# Altium PCB [1] initial circuit.PcbDoc
Units mm, origin at the board's own origin, x right, y up, seen from the top; angles counter-clockwise.
Board outline 47.62 x 91.31 mm, 2 copper layers (Top Layer, Bottom Layer); 26 components, 23 nets, 104 pads, 0 vias.
Unrouted connection lines stored in the file: 58.
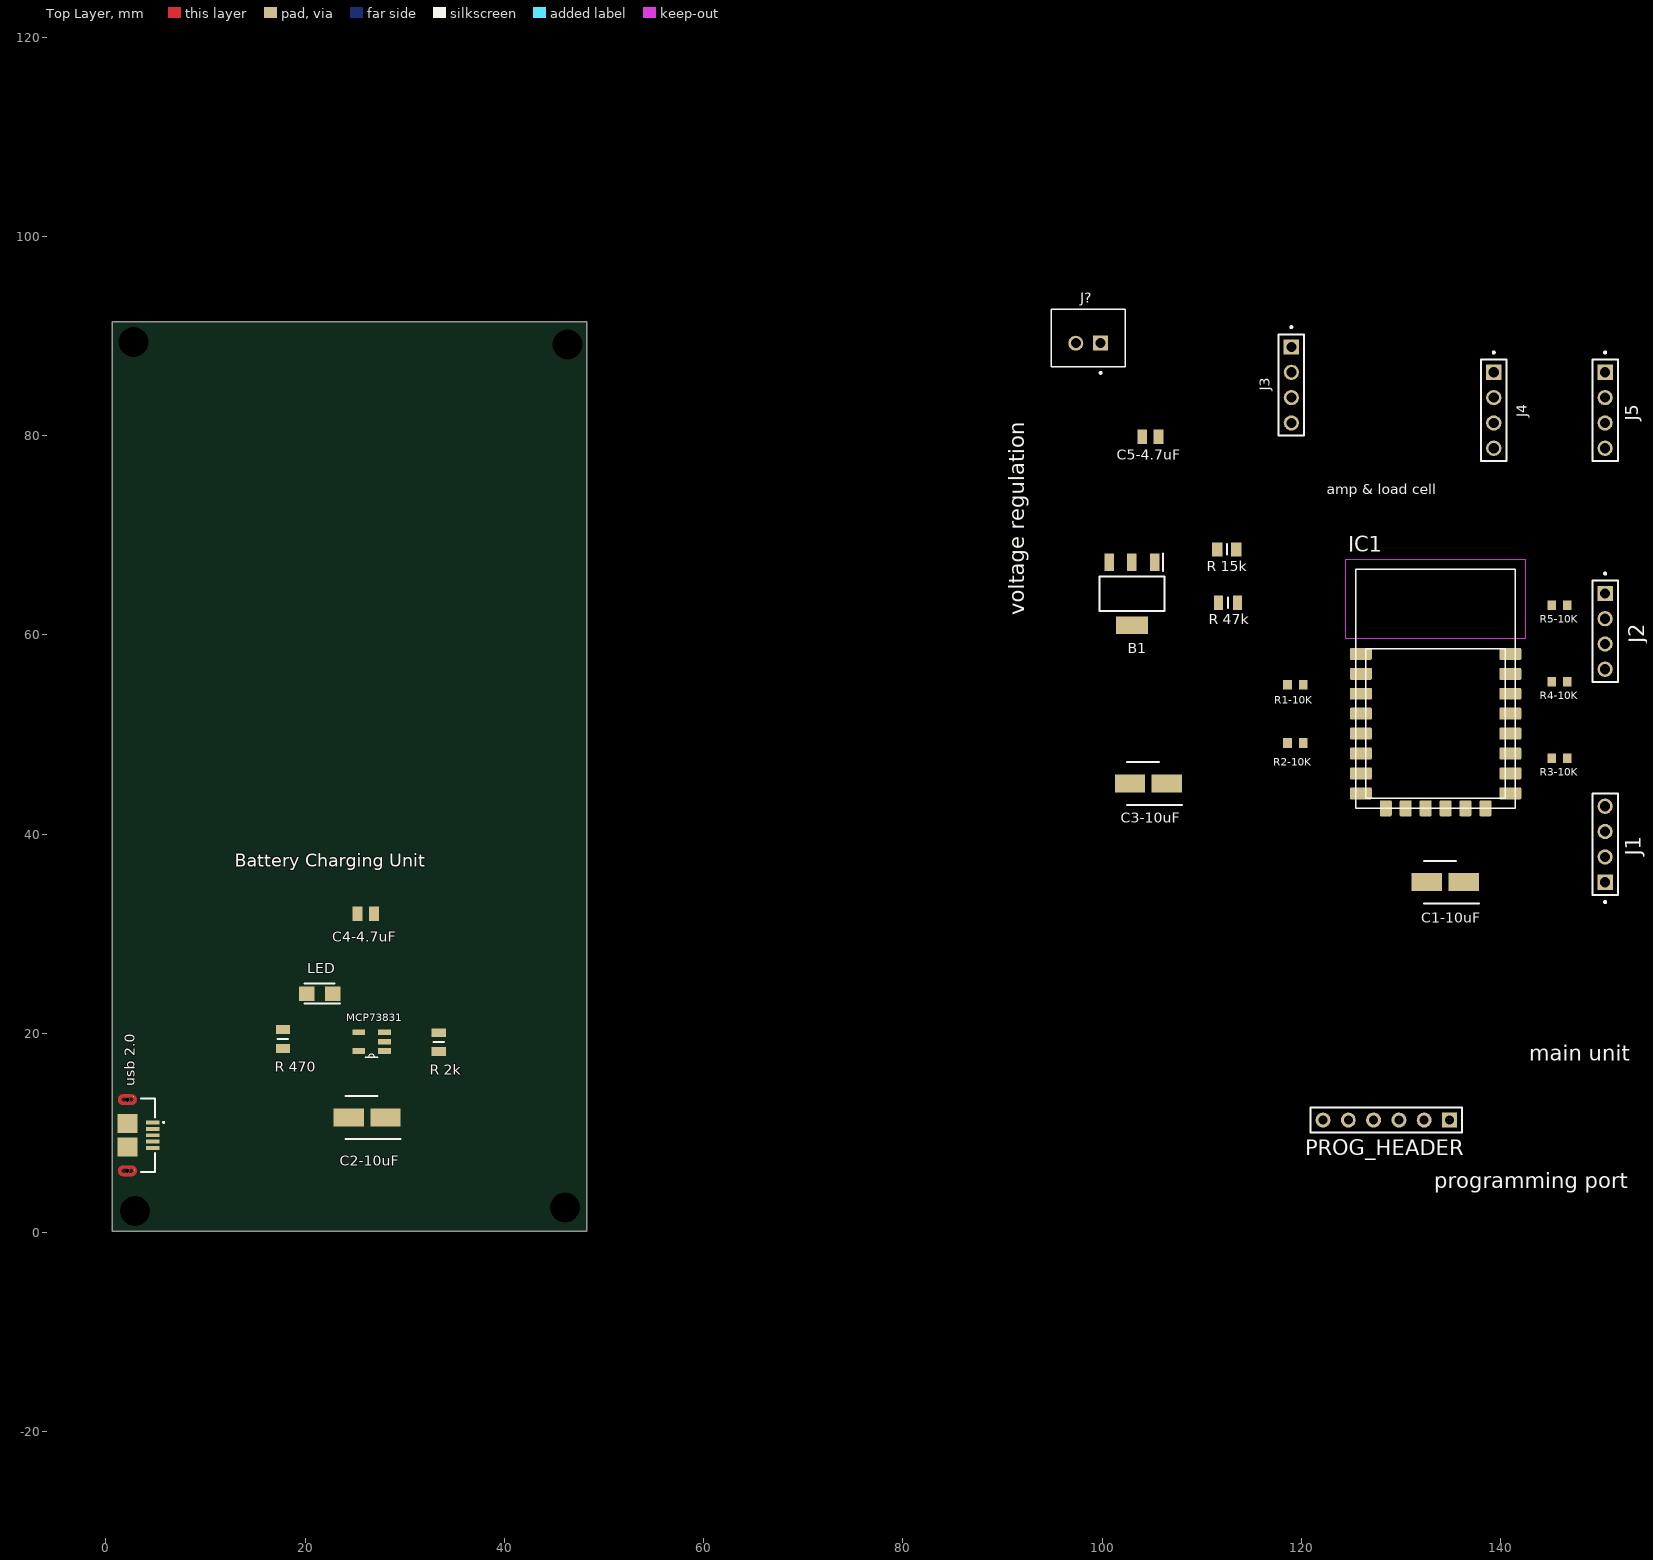
[diagram p0: Top Layer view]
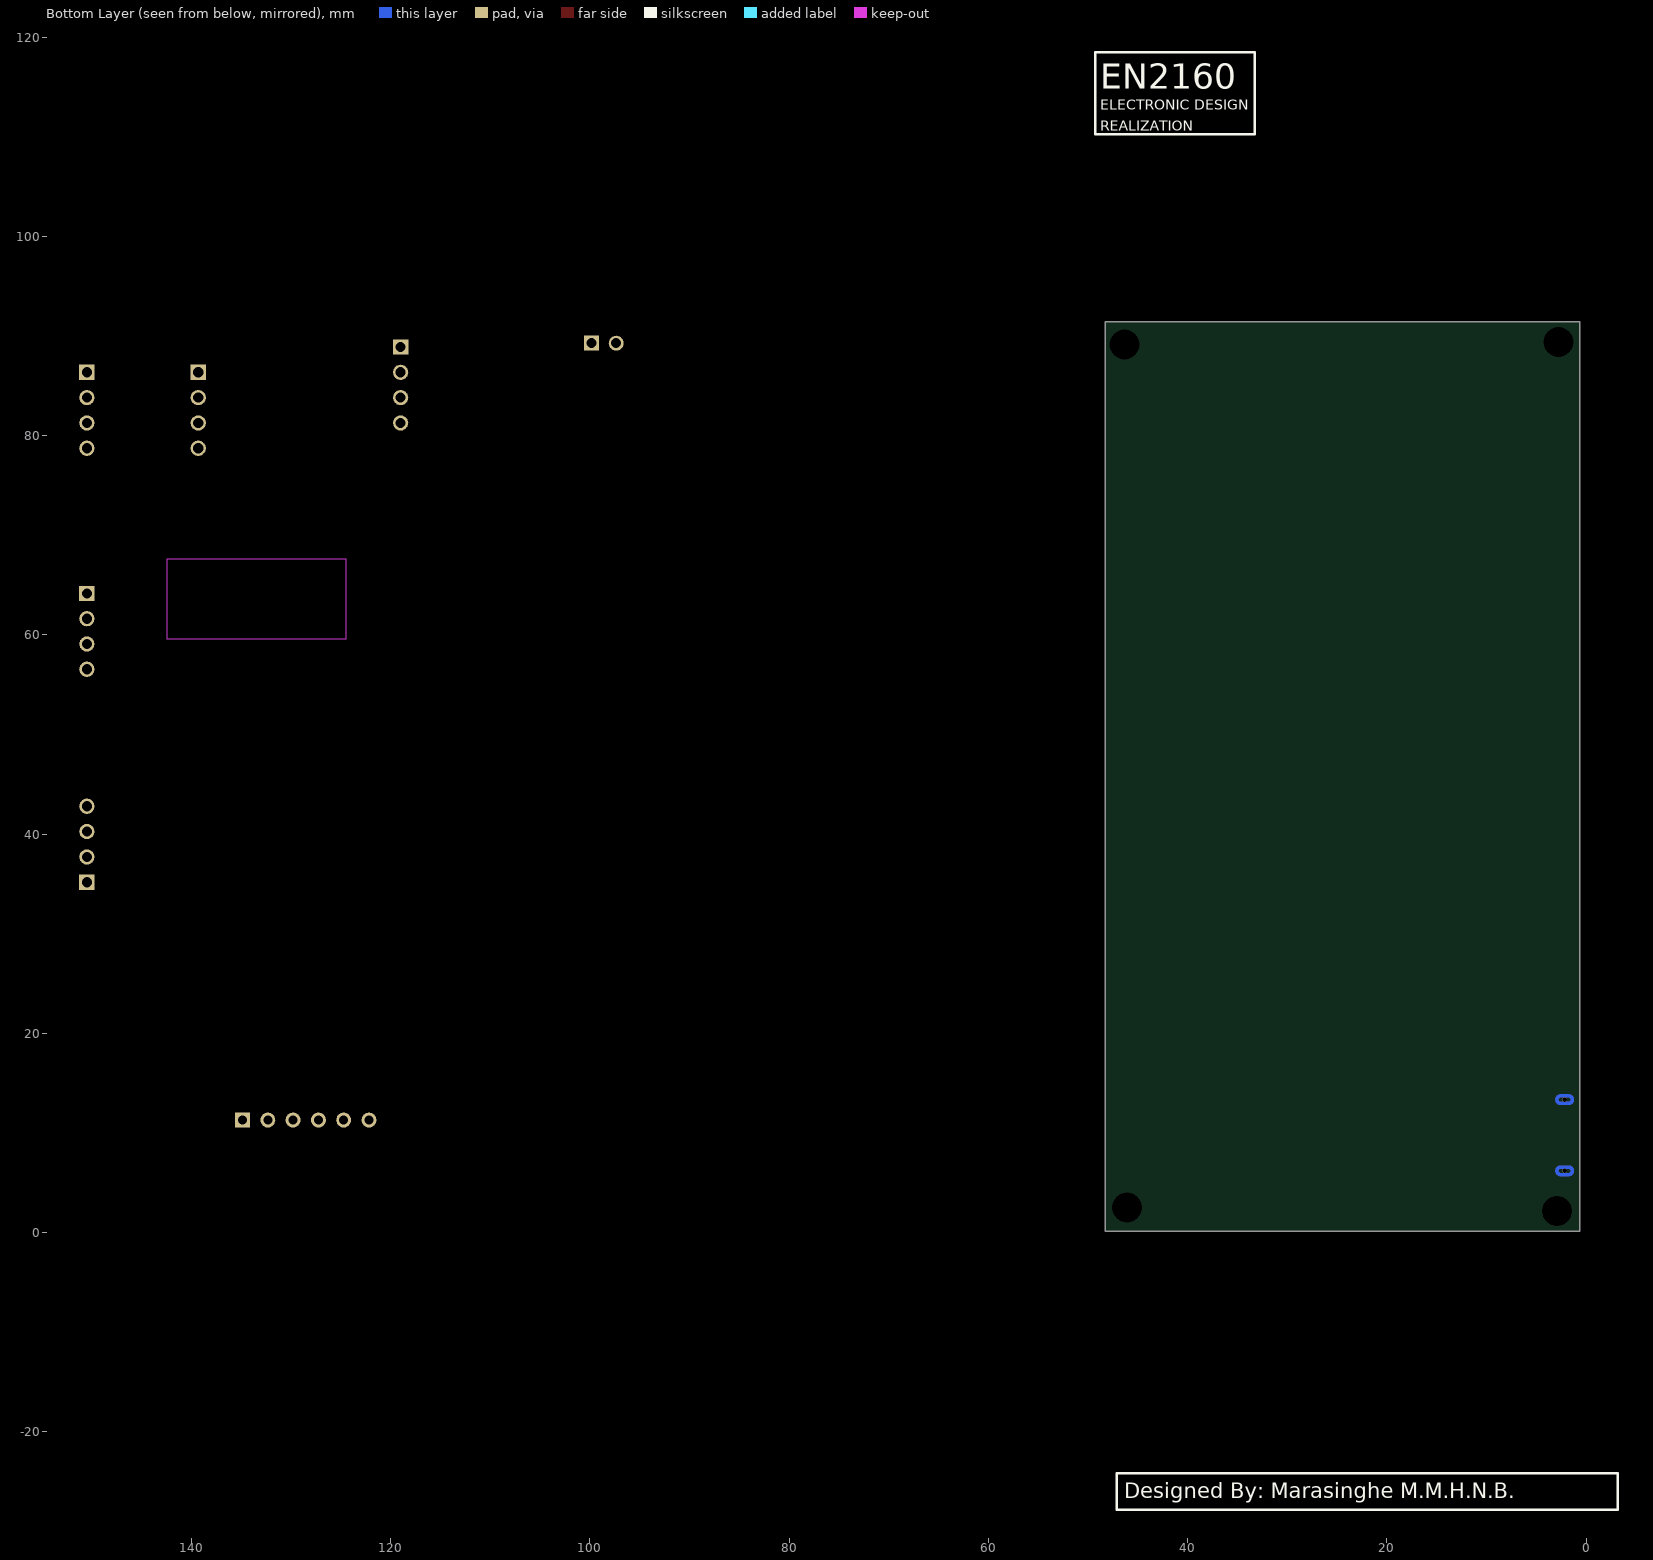
[diagram p1: Bottom Layer view, seen from below]

## Layer stack, top to bottom
Top Solder: solder mask 0.0102, Solder Resist, Dk 3.5
Top Layer: signal copper 0.0356
Dielectric 1: dielectric 0.32, FR-4, Dk 4.8
Bottom Layer: signal copper 0.0356
Bottom Solder: solder mask 0.0102, Solder Resist, Dk 3.5

## Board outline
0.635,0.127 0.635,91.44 48.26,91.44 48.26,0.127

## Design rules (kind name [scope] priority, off if disabled: settings)
Clearance "Clearance Bottom Layer" [OnLayer('Bottom Layer')] p1: gap=0.203 ignorepadtopadclearanceinfootprint=TRUE except(0.254: Arc-Text Track-Text SMDPad-Text THPad-Text Via-Text Fill-Text Poly-Text Region-Text Text-Text)
Clearance "Clearance Top Layer" [OnLayer('Top Layer')] p2: gap=0.203 ignorepadtopadclearanceinfootprint=TRUE except(0.254: Arc-Text Track-Text SMDPad-Text THPad-Text Via-Text Fill-Text Poly-Text Region-Text Text-Text)
Clearance [All] p3: gap=0.2 ignorepadtopadclearanceinfootprint=FALSE except(0.089: Arc-Arc Arc-Track Arc-SMDPad Track-Track Track-SMDPad SMDPad-SMDPad; 0.127: Arc-Via Track-Via SMDPad-Via THPad-Via Via-Via; 0.254: Arc-Text Track-Text SMDPad-Text THPad-Text Via-Text Fill-Text Poly-Text Region-Text Text-Text)
PolygonConnect [All] p1: connectstyle=Relief reliefconductorwidth=0.254 reliefentries=4 polygonreliefangle="90 Angle" airgapwidth=0.254
RoutingVias [All] p1: holewidth=0.711 width=1.27 viastyle="Through Hole" minholewidth=0.711 minwidth=1.27 maxholewidth=0.711 maxwidth=1.27
SolderMaskExpansion [All] p1: expansion=0.102 istentingtop=FALSE
Width [All] p1: maxlimit=0.254 minlimit=0.254 preferedwidth=0.254
30 further rules are at their usual default settings.

## Components (designator, comment, footprint, x,y, rotation, side; value= is the part's Value field where it differs from the comment)
B1 "TC2117-3.3VDBTR" SOT230P700X180-4N 102.997,64.135 r270 top
C1-10uF "865080340001" CAPAE430X550N 134.438,35.179 r180 top
C2-10uF "865080340001" CAPAE430X550N 26.217,11.557 r180 top
C3-10uF "865080340001" CAPAE430X550N 104.648,45.085 r180 top
C4-4.7uF "885012107013" CAPC2012X145N 26.093,32.004 r180 top
C5-4.7uF "885012107013" CAPC2012X145N 104.847,79.883 r180 top
IC1 "ESP-12F" ESP-12F 133.477,53.594 r0 top
J1 "MTSW-104-XX-X-S-XXX" SAMTEC_MTSW-104-XX-X-S-XXX 150.495,38.989 r90 top
J2 "MTSW-104-XX-X-S-XXX" SAMTEC_MTSW-104-XX-X-S-XXX 150.495,60.359 r270 top
J3 "MTSW-104-XX-X-S-XXX" SAMTEC_MTSW-104-XX-X-S-XXX 118.999,85.09 r270 top
J4 "MTSW-104-XX-X-S-XXX" SAMTEC_MTSW-104-XX-X-S-XXX 139.319,82.55 r270 top
J5 "MTSW-104-XX-X-S-XXX" SAMTEC_MTSW-104-XX-X-S-XXX 150.495,82.55 r270 top
J? "B2B-XH-A(LF)(SN)" JST_B2B-XH-A(LF)(SN) 98.61,89.281 r0 top
LED "CLM3C-AKW-CUAVB253" LEDM3020X140N 21.463,24.003 r180 top
MCP73831 "MCP73831T-5ACI/OT" SOT95P280X145-5N 26.67,19.177 r180 top
PROG_HEADER "Header 6" HDR1X6 134.874,11.303 r180 top
R1-10K "CRG0603F10K/10" RESC1608X55N 119.398,54.991 r180 top
R2-10K "CRG0603F10K/10" RESC1608X55N 119.398,49.149 r180 top
R3-10K "CRG0603F10K/10" RESC1608X55N 145.923,47.625 r180 top
R4-10K "CRG0603F10K/10" RESC1608X55N 145.923,55.308 r180 top
R5-10K "CRG0603F10K/10" RESC1608X55N 145.923,62.992 r180 top
"R 2k" "CR0805-JW-202ELF" RESC2012X60N 33.401,19.116 r270 top
"R 15k" "ERJ-6GEYJ153V" RESC2012X70N 112.522,68.58 r0 top
"R 47k" "CR0805-JW-473ELF" RESC2012X60N 112.649,63.246 r180 top
"R 470" "CRCW0805470RFKEAC" RESC2012X60N 17.78,19.431 r90 top
"usb 2.0" "USB3090-XX-X_REVE" GCT_USB3090-XX-X_REVE 2.159,9.779 r270 top

## Footprints (in the part's own frame and the unit in brackets; to place one, negate y for a bottom-side part, rotate by r counter-clockwise, add the part's x,y. Pads: shape width x height; smd on the part's side, far side on the other; paste and mask are expansions set on the pad)
CAPAE430X550N [mm]
  rect 3.05x1.8 smd: 1(-1.85,0) 2(1.85,0)
  silkscreen extent -3.37,-2.15 2.15,2.15, body extent -10,-3.38 10,3.38, height 5.8
CAPC2012X145N [mm]
  rect 0.99x1.47 smd: 1(-0.82,0) 2(0.82,0)
  body extent -10,-3.38 10,3.38, height 5.8
ESP-12F [mm]
  rrect20% 2.2x1.2 smd: 1(-7.5,4.5) 2(-7.5,2.5) 3(-7.5,0.5) 4(-7.5,-1.5) 5(-7.5,-3.5) 6(-7.5,-5.5) 7(-7.5,-7.5) 8(-7.5,-9.5) 9(7.5,-9.5) 10(7.5,-7.5) 11(7.5,-5.5) 12(7.5,-3.5) 13(7.5,-1.5) 14(7.5,0.5) 15(7.5,2.5) 16(7.5,4.5)
  rrect20% 1.2x1.6 smd: 17(-5,-11) 18(-3,-11) 19(-1,-11) 20(1,-11) 21(3,-11) 22(5,-11)
  Keep-Out Layer region: 9,6.011 -9.016,6.011 -9.016,14 9,14
  Keep-Out Layer region: 9,6.005 -9.007,6.005 -9.007,14 9,14
  silkscreen extent -8,-11 8,13, body extent -8.85,-11.88 8.85,13.02, height 3.1
GCT_USB3090-XX-X_REVE [mm]
  rect 0.4x1.4 smd: 1(-1.3,2.55) 2(-0.65,2.55) 3(0,2.55) 4(0.65,2.55) 5(1.3,2.55)
  rect 0.1x0.1 smd paste-1 mask+0: 6(-3.87,0.63) 7(3.51,0.72)
  rect 1.9x2 smd: 8(-1.2,0) 9(1.2,0)
  round 0.45 hole 0.45 unplated: ""(-3.575,0) ""(3.575,0)
  Top Layer region: -3.548,0.924 -3.52,0.922 -3.493,0.919 -3.466,0.914 -3.439,0.907 -3.413,0.899 -3.387,0.89 -3.361,0.88 -3.337,0.868 -3.313,0.855 -3.289,0.84 -3.266,0.825 -3.245,0.808 -3.224,0.79 -3.204,0.771 -3.185,0.751 -3.167,0.73 -3.15,0.709 -3.135,0.686 -3.12,0.662 -3.107,0.638 -3.095,0.614 -3.085,0.588 -3.076,0.562 -3.068,0.536 -3.061,0.509 -3.056,0.482 -3.053,0.455 -3.051,0.427 -3.05,0.4 -3.05,0 -3.35,0 -3.35,0.4 -3.35,0.412 -3.351,0.424 -3.353,0.435 -3.355,0.447 -3.358,0.458 -3.361,0.47 -3.365,0.481 -3.369,0.492 -3.375,0.502 -3.38,0.512 -3.386,0.523 -3.393,0.532 -3.4,0.542 -3.408,0.551 -3.416,0.559 -3.424,0.567 -3.433,0.575 -3.443,0.582 -3.452,0.589 -3.463,0.595 -3.473,0.6 -3.483,0.606 -3.494,0.61 -3.505,0.614 -3.517,0.617 -3.528,0.62 -3.54,0.622 -3.551,0.624 -3.563,0.625 -3.587,0.625 -3.599,0.624 -3.61,0.622 -3.622,0.62 -3.633,0.617 -3.645,0.614 -3.656,0.61 -3.667,0.606 -3.677,0.6 -3.688,0.595 -3.698,0.589 -3.707,0.582 -3.717,0.575 -3.726,0.567 -3.734,0.559 -3.742,0.551 -3.75,0.542 -3.757,0.532 -3.764,0.523 -3.77,0.513 -3.775,0.502 -3.781,0.492 -3.785,0.481 -3.789,0.47 -3.792,0.458 -3.795,0.447 -3.797,0.435 -3.799,0.424 -3.8,0.412 -3.8,0.4 -3.8,0 -4.1,0 -4.1,0.4 -4.099,0.427 -4.097,0.455 -4.094,0.482 -4.089,0.509 -4.082,0.536 -4.074,0.562 -4.065,0.588 -4.055,0.614 -4.043,0.638 -4.03,0.663 -4.015,0.686 -4,0.709 -3.983,0.73 -3.965,0.751 -3.946,0.771 -3.926,0.79 -3.905,0.808 -3.884,0.825 -3.861,0.84 -3.837,0.855 -3.813,0.868 -3.789,0.88 -3.763,0.89 -3.737,0.899 -3.711,0.907 -3.684,0.914 -3.657,0.919 -3.63,0.922 -3.602,0.924 -3.575,0.925
  Top Layer region: -3.05,-0.4 -3.051,-0.427 -3.053,-0.455 -3.056,-0.482 -3.061,-0.509 -3.068,-0.536 -3.076,-0.562 -3.085,-0.588 -3.095,-0.614 -3.107,-0.638 -3.12,-0.662 -3.135,-0.686 -3.15,-0.709 -3.167,-0.73 -3.185,-0.751 -3.204,-0.771 -3.224,-0.79 -3.245,-0.808 -3.266,-0.825 -3.289,-0.84 -3.313,-0.855 -3.337,-0.868 -3.361,-0.88 -3.387,-0.89 -3.413,-0.899 -3.439,-0.907 -3.466,-0.914 -3.493,-0.919 -3.52,-0.922 -3.548,-0.924 -3.575,-0.925 -3.602,-0.924 -3.63,-0.922 -3.657,-0.919 -3.684,-0.914 -3.711,-0.907 -3.737,-0.899 -3.763,-0.89 -3.789,-0.88 -3.813,-0.868 -3.837,-0.855 -3.861,-0.84 -3.884,-0.825 -3.905,-0.808 -3.926,-0.79 -3.946,-0.771 -3.965,-0.751 -3.983,-0.73 -4,-0.709 -4.015,-0.686 -4.03,-0.663 -4.043,-0.638 -4.055,-0.614 -4.065,-0.588 -4.074,-0.562 -4.082,-0.536 -4.089,-0.509 -4.094,-0.482 -4.097,-0.455 -4.099,-0.427 -4.1,-0.4 -4.1,0 -3.8,0 -3.8,-0.4 -3.8,-0.412 -3.799,-0.424 -3.797,-0.435 -3.795,-0.447 -3.792,-0.458 -3.789,-0.47 -3.785,-0.481 -3.781,-0.492 -3.775,-0.502 -3.77,-0.513 -3.764,-0.523 -3.757,-0.532 -3.75,-0.542 -3.742,-0.551 -3.734,-0.559 -3.726,-0.567 -3.717,-0.575 -3.707,-0.582 -3.698,-0.589 -3.688,-0.595 -3.677,-0.6 -3.667,-0.606 -3.656,-0.61 -3.645,-0.614 -3.633,-0.617 -3.622,-0.62 -3.61,-0.622 -3.599,-0.624 -3.587,-0.625 -3.563,-0.625 -3.551,-0.624 -3.54,-0.622 -3.528,-0.62 -3.517,-0.617 -3.505,-0.614 -3.494,-0.61 -3.483,-0.606 -3.473,-0.6 -3.463,-0.595 -3.452,-0.589 -3.443,-0.582 -3.433,-0.575 -3.424,-0.567 -3.416,-0.559 -3.408,-0.551 -3.4,-0.542 -3.393,-0.532 -3.386,-0.523 -3.38,-0.512 -3.375,-0.502 -3.369,-0.492 -3.365,-0.481 -3.361,-0.47 -3.358,-0.458 -3.355,-0.447 -3.353,-0.435 -3.351,-0.424 -3.35,-0.412 -3.35,-0.4 -3.35,0 -3.05,0
  Top Layer region: 3.602,0.924 3.63,0.922 3.657,0.919 3.684,0.914 3.711,0.907 3.737,0.899 3.763,0.89 3.789,0.88 3.813,0.868 3.837,0.855 3.861,0.84 3.884,0.825 3.905,0.808 3.926,0.79 3.946,0.771 3.965,0.751 3.983,0.73 4,0.709 4.015,0.686 4.03,0.663 4.043,0.638 4.055,0.614 4.065,0.588 4.074,0.562 4.082,0.536 4.089,0.509 4.094,0.482 4.097,0.455 4.099,0.427 4.1,0.4 4.1,0 3.8,0 3.8,0.4 3.8,0.412 3.799,0.424 3.797,0.435 3.795,0.447 3.792,0.458 3.789,0.47 3.785,0.481 3.781,0.492 3.775,0.502 3.77,0.513 3.764,0.523 3.757,0.532 3.75,0.542 3.742,0.551 3.734,0.559 3.726,0.567 3.717,0.575 3.707,0.582 3.698,0.589 3.688,0.595 3.677,0.6 3.667,0.606 3.656,0.61 3.645,0.614 3.633,0.617 3.622,0.62 3.61,0.622 3.599,0.624 3.587,0.625 3.563,0.625 3.551,0.624 3.54,0.622 3.528,0.62 3.517,0.617 3.505,0.614 3.494,0.61 3.483,0.606 3.473,0.6 3.463,0.595 3.452,0.589 3.443,0.582 3.433,0.575 3.424,0.567 3.416,0.559 3.408,0.551 3.4,0.542 3.393,0.532 3.386,0.523 3.38,0.512 3.375,0.502 3.369,0.492 3.365,0.481 3.361,0.47 3.358,0.458 3.355,0.447 3.353,0.435 3.351,0.424 3.35,0.412 3.35,0.4 3.35,0 3.05,0 3.05,0.4 3.051,0.427 3.053,0.455 3.056,0.482 3.061,0.509 3.068,0.536 3.076,0.562 3.085,0.588 3.095,0.614 3.107,0.638 3.12,0.662 3.135,0.686 3.15,0.709 3.167,0.73 3.185,0.751 3.204,0.771 3.224,0.79 3.245,0.808 3.266,0.825 3.289,0.84 3.313,0.855 3.337,0.868 3.361,0.88 3.387,0.89 3.413,0.899 3.439,0.907 3.466,0.914 3.493,0.919 3.52,0.922 3.548,0.924 3.575,0.925
  Top Layer region: 4.1,-0.4 4.099,-0.427 4.097,-0.455 4.094,-0.482 4.089,-0.509 4.082,-0.536 4.074,-0.562 4.065,-0.588 4.055,-0.614 4.043,-0.638 4.03,-0.663 4.015,-0.686 4,-0.709 3.983,-0.73 3.965,-0.751 3.946,-0.771 3.926,-0.79 3.905,-0.808 3.884,-0.825 3.861,-0.84 3.837,-0.855 3.813,-0.868 3.789,-0.88 3.763,-0.89 3.737,-0.899 3.711,-0.907 3.684,-0.914 3.657,-0.919 3.63,-0.922 3.602,-0.924 3.575,-0.925 3.548,-0.924 3.52,-0.922 3.493,-0.919 3.466,-0.914 3.439,-0.907 3.413,-0.899 3.387,-0.89 3.361,-0.88 3.337,-0.868 3.313,-0.855 3.289,-0.84 3.266,-0.825 3.245,-0.808 3.224,-0.79 3.204,-0.771 3.185,-0.751 3.167,-0.73 3.15,-0.709 3.135,-0.686 3.12,-0.662 3.107,-0.638 3.095,-0.614 3.085,-0.588 3.076,-0.562 3.068,-0.536 3.061,-0.509 3.056,-0.482 3.053,-0.455 3.051,-0.427 3.05,-0.4 3.05,0 3.35,0 3.35,-0.4 3.35,-0.412 3.351,-0.424 3.353,-0.435 3.355,-0.447 3.358,-0.458 3.361,-0.47 3.365,-0.481 3.369,-0.492 3.375,-0.502 3.38,-0.512 3.386,-0.523 3.393,-0.532 3.4,-0.542 3.408,-0.551 3.416,-0.559 3.424,-0.567 3.433,-0.575 3.443,-0.582 3.452,-0.589 3.463,-0.595 3.473,-0.6 3.483,-0.606 3.494,-0.61 3.505,-0.614 3.517,-0.617 3.528,-0.62 3.54,-0.622 3.551,-0.624 3.563,-0.625 3.587,-0.625 3.599,-0.624 3.61,-0.622 3.622,-0.62 3.633,-0.617 3.645,-0.614 3.656,-0.61 3.667,-0.606 3.677,-0.6 3.688,-0.595 3.698,-0.589 3.707,-0.582 3.717,-0.575 3.726,-0.567 3.734,-0.559 3.742,-0.551 3.75,-0.542 3.757,-0.532 3.764,-0.523 3.77,-0.513 3.775,-0.502 3.781,-0.492 3.785,-0.481 3.789,-0.47 3.792,-0.458 3.795,-0.447 3.797,-0.435 3.799,-0.424 3.8,-0.412 3.8,-0.4 3.8,0 4.1,0
  Bottom Layer region: -3.548,0.924 -3.52,0.922 -3.493,0.919 -3.466,0.914 -3.439,0.907 -3.413,0.899 -3.387,0.89 -3.361,0.88 -3.337,0.868 -3.313,0.855 -3.289,0.84 -3.266,0.825 -3.245,0.808 -3.224,0.79 -3.204,0.771 -3.185,0.751 -3.167,0.73 -3.15,0.709 -3.135,0.686 -3.12,0.662 -3.107,0.638 -3.095,0.614 -3.085,0.588 -3.076,0.562 -3.068,0.536 -3.061,0.509 -3.056,0.482 -3.053,0.455 -3.051,0.427 -3.05,0.4 -3.05,0 -3.35,0 -3.35,0.4 -3.35,0.412 -3.351,0.424 -3.353,0.435 -3.355,0.447 -3.358,0.458 -3.361,0.47 -3.365,0.481 -3.369,0.492 -3.375,0.502 -3.38,0.512 -3.386,0.523 -3.393,0.532 -3.4,0.542 -3.408,0.551 -3.416,0.559 -3.424,0.567 -3.433,0.575 -3.443,0.582 -3.452,0.589 -3.463,0.595 -3.473,0.6 -3.483,0.606 -3.494,0.61 -3.505,0.614 -3.517,0.617 -3.528,0.62 -3.54,0.622 -3.551,0.624 -3.563,0.625 -3.587,0.625 -3.599,0.624 -3.61,0.622 -3.622,0.62 -3.633,0.617 -3.645,0.614 -3.656,0.61 -3.667,0.606 -3.677,0.6 -3.688,0.595 -3.698,0.589 -3.707,0.582 -3.717,0.575 -3.726,0.567 -3.734,0.559 -3.742,0.551 -3.75,0.542 -3.757,0.532 -3.764,0.523 -3.77,0.513 -3.775,0.502 -3.781,0.492 -3.785,0.481 -3.789,0.47 -3.792,0.458 -3.795,0.447 -3.797,0.435 -3.799,0.424 -3.8,0.412 -3.8,0.4 -3.8,0 -4.1,0 -4.1,0.4 -4.099,0.427 -4.097,0.455 -4.094,0.482 -4.089,0.509 -4.082,0.536 -4.074,0.562 -4.065,0.588 -4.055,0.614 -4.043,0.638 -4.03,0.663 -4.015,0.686 -4,0.709 -3.983,0.73 -3.965,0.751 -3.946,0.771 -3.926,0.79 -3.905,0.808 -3.884,0.825 -3.861,0.84 -3.837,0.855 -3.813,0.868 -3.789,0.88 -3.763,0.89 -3.737,0.899 -3.711,0.907 -3.684,0.914 -3.657,0.919 -3.63,0.922 -3.602,0.924 -3.575,0.925
  Bottom Layer region: -3.05,-0.4 -3.051,-0.427 -3.053,-0.455 -3.056,-0.482 -3.061,-0.509 -3.068,-0.536 -3.076,-0.562 -3.085,-0.588 -3.095,-0.614 -3.107,-0.638 -3.12,-0.662 -3.135,-0.686 -3.15,-0.709 -3.167,-0.73 -3.185,-0.751 -3.204,-0.771 -3.224,-0.79 -3.245,-0.808 -3.266,-0.825 -3.289,-0.84 -3.313,-0.855 -3.337,-0.868 -3.361,-0.88 -3.387,-0.89 -3.413,-0.899 -3.439,-0.907 -3.466,-0.914 -3.493,-0.919 -3.52,-0.922 -3.548,-0.924 -3.575,-0.925 -3.602,-0.924 -3.63,-0.922 -3.657,-0.919 -3.684,-0.914 -3.711,-0.907 -3.737,-0.899 -3.763,-0.89 -3.789,-0.88 -3.813,-0.868 -3.837,-0.855 -3.861,-0.84 -3.884,-0.825 -3.905,-0.808 -3.926,-0.79 -3.946,-0.771 -3.965,-0.751 -3.983,-0.73 -4,-0.709 -4.015,-0.686 -4.03,-0.663 -4.043,-0.638 -4.055,-0.614 -4.065,-0.588 -4.074,-0.562 -4.082,-0.536 -4.089,-0.509 -4.094,-0.482 -4.097,-0.455 -4.099,-0.427 -4.1,-0.4 -4.1,0 -3.8,0 -3.8,-0.4 -3.8,-0.412 -3.799,-0.424 -3.797,-0.435 -3.795,-0.447 -3.792,-0.458 -3.789,-0.47 -3.785,-0.481 -3.781,-0.492 -3.775,-0.502 -3.77,-0.513 -3.764,-0.523 -3.757,-0.532 -3.75,-0.542 -3.742,-0.551 -3.734,-0.559 -3.726,-0.567 -3.717,-0.575 -3.707,-0.582 -3.698,-0.589 -3.688,-0.595 -3.677,-0.6 -3.667,-0.606 -3.656,-0.61 -3.645,-0.614 -3.633,-0.617 -3.622,-0.62 -3.61,-0.622 -3.599,-0.624 -3.587,-0.625 -3.563,-0.625 -3.551,-0.624 -3.54,-0.622 -3.528,-0.62 -3.517,-0.617 -3.505,-0.614 -3.494,-0.61 -3.483,-0.606 -3.473,-0.6 -3.463,-0.595 -3.452,-0.589 -3.443,-0.582 -3.433,-0.575 -3.424,-0.567 -3.416,-0.559 -3.408,-0.551 -3.4,-0.542 -3.393,-0.532 -3.386,-0.523 -3.38,-0.512 -3.375,-0.502 -3.369,-0.492 -3.365,-0.481 -3.361,-0.47 -3.358,-0.458 -3.355,-0.447 -3.353,-0.435 -3.351,-0.424 -3.35,-0.412 -3.35,-0.4 -3.35,0 -3.05,0
  Bottom Layer region: 3.602,0.924 3.63,0.922 3.657,0.919 3.684,0.914 3.711,0.907 3.737,0.899 3.763,0.89 3.789,0.88 3.813,0.868 3.837,0.855 3.861,0.84 3.884,0.825 3.905,0.808 3.926,0.79 3.946,0.771 3.965,0.751 3.983,0.73 4,0.709 4.015,0.686 4.03,0.663 4.043,0.638 4.055,0.614 4.065,0.588 4.074,0.562 4.082,0.536 4.089,0.509 4.094,0.482 4.097,0.455 4.099,0.427 4.1,0.4 4.1,0 3.8,0 3.8,0.4 3.8,0.412 3.799,0.424 3.797,0.435 3.795,0.447 3.792,0.458 3.789,0.47 3.785,0.481 3.781,0.492 3.775,0.502 3.77,0.513 3.764,0.523 3.757,0.532 3.75,0.542 3.742,0.551 3.734,0.559 3.726,0.567 3.717,0.575 3.707,0.582 3.698,0.589 3.688,0.595 3.677,0.6 3.667,0.606 3.656,0.61 3.645,0.614 3.633,0.617 3.622,0.62 3.61,0.622 3.599,0.624 3.587,0.625 3.563,0.625 3.551,0.624 3.54,0.622 3.528,0.62 3.517,0.617 3.505,0.614 3.494,0.61 3.483,0.606 3.473,0.6 3.463,0.595 3.452,0.589 3.443,0.582 3.433,0.575 3.424,0.567 3.416,0.559 3.408,0.551 3.4,0.542 3.393,0.532 3.386,0.523 3.38,0.512 3.375,0.502 3.369,0.492 3.365,0.481 3.361,0.47 3.358,0.458 3.355,0.447 3.353,0.435 3.351,0.424 3.35,0.412 3.35,0.4 3.35,0 3.05,0 3.05,0.4 3.051,0.427 3.053,0.455 3.056,0.482 3.061,0.509 3.068,0.536 3.076,0.562 3.085,0.588 3.095,0.614 3.107,0.638 3.12,0.662 3.135,0.686 3.15,0.709 3.167,0.73 3.185,0.751 3.204,0.771 3.224,0.79 3.245,0.808 3.266,0.825 3.289,0.84 3.313,0.855 3.337,0.868 3.361,0.88 3.387,0.89 3.413,0.899 3.439,0.907 3.466,0.914 3.493,0.919 3.52,0.922 3.548,0.924 3.575,0.925
  Bottom Layer region: 4.1,-0.4 4.099,-0.427 4.097,-0.455 4.094,-0.482 4.089,-0.509 4.082,-0.536 4.074,-0.562 4.065,-0.588 4.055,-0.614 4.043,-0.638 4.03,-0.663 4.015,-0.686 4,-0.709 3.983,-0.73 3.965,-0.751 3.946,-0.771 3.926,-0.79 3.905,-0.808 3.884,-0.825 3.861,-0.84 3.837,-0.855 3.813,-0.868 3.789,-0.88 3.763,-0.89 3.737,-0.899 3.711,-0.907 3.684,-0.914 3.657,-0.919 3.63,-0.922 3.602,-0.924 3.575,-0.925 3.548,-0.924 3.52,-0.922 3.493,-0.919 3.466,-0.914 3.439,-0.907 3.413,-0.899 3.387,-0.89 3.361,-0.88 3.337,-0.868 3.313,-0.855 3.289,-0.84 3.266,-0.825 3.245,-0.808 3.224,-0.79 3.204,-0.771 3.185,-0.751 3.167,-0.73 3.15,-0.709 3.135,-0.686 3.12,-0.662 3.107,-0.638 3.095,-0.614 3.085,-0.588 3.076,-0.562 3.068,-0.536 3.061,-0.509 3.056,-0.482 3.053,-0.455 3.051,-0.427 3.05,-0.4 3.05,0 3.35,0 3.35,-0.4 3.35,-0.412 3.351,-0.424 3.353,-0.435 3.355,-0.447 3.358,-0.458 3.361,-0.47 3.365,-0.481 3.369,-0.492 3.375,-0.502 3.38,-0.512 3.386,-0.523 3.393,-0.532 3.4,-0.542 3.408,-0.551 3.416,-0.559 3.424,-0.567 3.433,-0.575 3.443,-0.582 3.452,-0.589 3.463,-0.595 3.473,-0.6 3.483,-0.606 3.494,-0.61 3.505,-0.614 3.517,-0.617 3.528,-0.62 3.54,-0.622 3.551,-0.624 3.563,-0.625 3.587,-0.625 3.599,-0.624 3.61,-0.622 3.622,-0.62 3.633,-0.617 3.645,-0.614 3.656,-0.61 3.667,-0.606 3.677,-0.6 3.688,-0.595 3.698,-0.589 3.707,-0.582 3.717,-0.575 3.726,-0.567 3.734,-0.559 3.742,-0.551 3.75,-0.542 3.757,-0.532 3.764,-0.523 3.77,-0.513 3.775,-0.502 3.781,-0.492 3.785,-0.481 3.789,-0.47 3.792,-0.458 3.795,-0.447 3.797,-0.435 3.799,-0.424 3.8,-0.412 3.8,-0.4 3.8,0 4.1,0
  silkscreen extent -3.7,1.37 3.7,3.69, body extent -3.9,-2.75 3.9,2.75, height 2.71
HDR1X6 [mm] "Connector; Header; 6 Position"
  rect 1.5x1.5 hole 0.9: 1(0,0)
  round 1.5 hole 0.9: 2(2.54,0) 3(5.08,0) 4(7.62,0) 5(10.16,0) 6(12.7,0)
  silkscreen extent -1.27,-1.27 13.97,1.27
JST_B2B-XH-A(LF)(SN) [mm]
  rect 1.508x1.508 hole 1: 1(1.25,0)
  round 1.508 hole 1: 2(-1.25,0)
  silkscreen extent -3.7,-3.07 3.7,3.4, body extent -3.72,-2.37 3.68,3.38, height 7
LEDM3020X140N [mm]
  rect 1.55x1.45 smd: 1(-1.3,0) 2(1.3,0)
  silkscreen extent -2.02,-1 1.5,1, body extent -1.5,-0.49 1.5,0.51, height 2.01
RESC1608X55N [mm]
  rect 0.87x0.97 smd: 1(-0.78,0) 2(0.78,0)
  body extent -0.8,-0.4 0.8,0.4, height 0.55
RESC2012X60N [mm]
  rect 0.9x1.45 smd: 1(-0.95,0) 2(0.95,0)
  silkscreen extent 0,-0.53 0,0.53, body extent -1,-0.63 1,0.63, height 0.6
RESC2012X70N [mm]
  rect 1.05x1.4 smd: 1(-0.95,0) 2(0.95,0)
  silkscreen extent 0,-0.53 0,0.53, body extent -1,-0.63 1,0.63, height 0.6
SAMTEC_MTSW-104-XX-X-S-XXX [mm]
  rect 1.53x1.53 hole 1.02: 01(-3.81,0)
  round 1.53 hole 1.02: 02(-1.27,0) 03(1.27,0) 04(3.81,0)
  silkscreen extent -5.9,-1.27 5.08,1.27, body extent -5.08,-1.27 5.08,1.27, height 13.21
SOT95P280X145-5N [mil]
  rect 50x22 smd: 1(-51,37) 2(-51,0) 3(-51,-37) 4(51,-37) 5(51,37)
  silkscreen extent -24,49 24,61, body extent -48,-55 58,59, height 57
SOT230P700X180-4N [mm]
  rect 1.75x0.95 smd: 1(-3.15,2.3) 2(-3.15,0) 3(-3.15,-2.3)
  rect 1.75x3.2 smd: 4(3.15,0)
  silkscreen extent -4.02,-3.25 1.75,3.25, body extent -10,-3.38 10,3.38, height 5.8

## Part data
B1: "Microchip TC2117-3.3VDBTR, LDO Voltage Regulator, 800mA, 3.3 V +/-0.5%, 2.7  6 Vin, 3-Pin SOT-223", Manufacturer_Name=Microchip, Mouser Part Number=579-TC2117-3.3VDBTR, Arrow Part Number=TC2117-3.3VDBTR, Arrow Price/Stock=https://www.arrow.com/en/products/tc2117-3.3vdbtr/microchip-technology?region=nac, Datasheet Link=https://componentsearchengine.com/Datasheets/2/TC2117-3.3VDBTR.pdf, Geometry.Height=1.8mm, Manufacturer_Part_Number=TC2117-3.3VDBTR, Mouser Price/Stock=https://www.mouser.co.uk/ProductDetail/Microchip-Technology/TC2117-3.3VDBTR?qs=AF%252BffTaPb30YsLOBvxArLw%3D%3D
C1-10uF C2-10uF C3-10uF: "Wurth Elektronik 10uF 16 V dc Aluminium Electrolytic Capacitor, WCAP-ASLI Series 2000h 4 (Dia.) x 5.35mm", Manufacturer_Name="Wurth Elektronik", Mouser Part Number=710-865080340001, Datasheet Link=https://componentsearchengine.com/Datasheets/1/865080340001.pdf, Geometry.Height=5.5mm, Manufacturer_Part_Number=865080340001, Mouser Price/Stock=https://www.mouser.co.uk/ProductDetail/Wurth-Elektronik/865080340001?qs=0KOYDY2FL2%252BaqRFD837lAw%3D%3D
C4-4.7uF C5-4.7uF: "Multilayer Ceramic Capacitor 4.7uF 0805", Manufacturer_Name="Wurth Elektronik", Mouser Part Number=710-885012107013, Datasheet Link=https://katalog.we-online.de/pbs/datasheet/885012107013.pdf, Geometry.Height=1.45mm, Manufacturer_Part_Number=885012107013, Mouser Price/Stock=https://www.mouser.co.uk/ProductDetail/Wurth-Elektronik/885012107013?qs=0KOYDY2FL29a055VqgRqNw%3D%3D
IC1: "WiFi Module", Package=Package, Availability="Not in stock", Check_prices=https://www.snapeda.com/parts/ESP-12F/AI-Thinker/view-part/?ref=eda, MF=AI-Thinker, MP=ESP-12F, Price=None, SnapEDA_Link=https://www.snapeda.com/parts/ESP-12F/AI-Thinker/view-part/?ref=snap
J1 J2 J3 J4 J5: Package=None, Availability="No availability data", Check_prices=https://www.snapeda.com/parts/MTSW-104-12-F-S-850/Samtec/view-part/6593359/?ref=eda, MF=Samtec, MP=MTSW-104-12-F-S-850, Price=None, SnapEDA_Link=https://www.snapeda.com/parts/MTSW-104-12-F-S-850/Samtec/view-part/6593359/?ref=snap
J?: "Connector Header Through Hole 2 position 0.098 (2.50mm)", Package=None, Availability="In Stock", MF="JST Sales", MP=B2B-XH-A(LF)(SN), Price=None, Purchase-URL=https://pricing.snapeda.com/search/part/B2B-XH-A(LF)(SN)/?ref=eda
LED: "Standard LEDs - SMD Amber LED Cree PLCC2 1 in 1 SMD LED CLM3C-RKW/AKW", Manufacturer_Name=Wolfspeed, Mouser Part Number=941-CLM3CAKWCUAVB253, Datasheet Link=https://www.mouser.co.uk/datasheet/2/90/CLM3CRKWAKW1156-274590.pdf, Geometry.Height=1.4mm, Manufacturer_Part_Number=CLM3C-AKW-CUAVB253, Mouser Price/Stock=https://www.mouser.co.uk/ProductDetail/Cree-LED/CLM3C-AKW-CUAVB253?qs=3AcK5DacLbqERPW6%2FzkoPg%3D%3D
MCP73831: "Charger IC Lithium Ion/Polymer SOT-23-5", Package="SOT-23-5 Microchip", Availability=Unavailable, MF=Microchip, MP=MCP73831T-5ACI/OT, Price=None, SnapEDA_Link=https://www.snapeda.com/parts/MCP73831T-5ACI/OT/Microchip/view-part/1037579/?ref=snap
PROG_HEADER: "Header, 6-Pin", LatestRevisionDate=17-Jul-2002, LatestRevisionNote="Re-released for DXP Platform.", Publisher="Altium Limited"
R1-10K R2-10K R3-10K R4-10K R5-10K: "Thick Film Resistors - SMD CRG0603 1% 10K 10K RL", Package=0603, Power_Rating=".1 W", Resistance=10K, Tolerance=1%, Voltage_Rating="50 V", Availability=Unavailable, EU_RoHS_Compliance="Compliant with Exemptions", MF="TE Connectivity", MP=CRG0603F10K/10, Price=None, SnapEDA_Link=https://www.snapeda.com/parts/CRG0603F10K/10/TE%20Connectivity%20Passive%20Product/view-part/979761/?ref=snap, TE_purchase_URL=https://www.te.com/usa-en/product-1622829-2.html?te_bu=Cor&te_type=disp&te_campaign=seda_glo_cor-seda-global-disp-prtnr-fy19-seda-model-bom-cta_sma-317_1&elqCampaignId=32493
"R 2k": "Resistor", Manufacturer_Name=Bourns, Mouser Part Number=652-CR0805JW-202ELF, Arrow Part Number=CR0805-JW-202ELF, Arrow Price/Stock=https://www.arrow.com/en/products/cr0805-jw-202elf/bourns, Datasheet Link=https://www.bourns.com/pdfs/chpreztr.pdf, Height=0.6mm, Manufacturer_Part_Number=CR0805-JW-202ELF, Mouser Price/Stock=https://www.mouser.co.uk/ProductDetail/Bourns/CR0805-JW-202ELF?qs=wL7NMIHXUPnyGz%2Fa3t%2FGQg%3D%3D
"R 15k": "Resistor", Manufacturer_Name=Panasonic, Mouser Part Number=667-ERJ-6GEYJ153V, Datasheet Link=https://datasheet.datasheetarchive.com/originals/distributors/DKDS40/DSANUWW0010935.pdf, Height=0.7mm, Manufacturer_Part_Number=ERJ-6GEYJ153V, Mouser Price/Stock=https://www.mouser.co.uk/ProductDetail/Panasonic/ERJ-6GEYJ153V?qs=gybxhQrZOyE8NVeFJR%2FEkg%3D%3D
"R 47k": "Resistor", Manufacturer_Name=Bourns, Mouser Part Number=652-CR0805JW-473ELF, Arrow Part Number=CR0805-JW-473ELF, Arrow Price/Stock=https://www.arrow.com/en/products/cr0805-jw-473elf/bourns?region=nac, Datasheet Link=https://www.bourns.com/pdfs/chpreztr.pdf, Height=0.6mm, Manufacturer_Part_Number=CR0805-JW-473ELF, Mouser Price/Stock=https://www.mouser.co.uk/ProductDetail/Bourns/CR0805-JW-473ELF?qs=%252BcBkmVQIZ2S5L%2FTv0l5Nkg%3D%3D
"R 470": "Resistor", Manufacturer_Name=Vishay, Mouser Part Number=71-CRCW0805470RFKEAC, Arrow Part Number=CRCW0805470RFKEAC, Arrow Price/Stock=https://www.arrow.com/en/products/crcw0805470rfkeac/vishay?region=nac, Datasheet Link=https://mouser.componentsearchengine.com/Datasheets/1/CRCW0805470RFKEAC.pdf, Height=0.6mm, Manufacturer_Part_Number=CRCW0805470RFKEAC, Mouser Price/Stock=https://www.mouser.co.uk/ProductDetail/Vishay-Dale/CRCW0805470RFKEAC?qs=E3Y5ESvWgWPsF5leBpDSrQ%3D%3D
"usb 2.0": "Micro USB Receptacle, Type AB, SMT, R/A, Bottom Mount, w/out Peg, w/outer shell stakes", Package=None, Availability=Unavailable, MP=USB3090-XX-X_REVE, Price=None

## Free pads (board coordinates)
  round 1.524 hole 3: 6(2.921,2.159) 7(46.101,2.54) 8(2.794,89.408) 9(46.355,89.154)

## Nets (pads, with @x,y where several pads share a name; then routed paths per layer and width w, separated by ;. In a path a pad name is that pad's centre, name@x,y a point inside that pad or via, vN(x,y) a via of type N, cw(c..) or ccw(c..) an arc to the next point about the centre after c; other vN are vias at no path point)
A+: J4.01 J5.01
A-: J4.02 J5.02
BatLev: "R 15k.2" "R 47k.1" IC1.2
DT: IC1.6 J3.03
E+: J4.04 J5.04
E-: J4.03 J5.03
FLASH: IC1.12 PROG_HEADER.2 R3-10K.1
GND: "R 2k.1" "R 15k.1" "usb 2.0.5" B1.1 C1-10uF.2 C2-10uF.2 C3-10uF.2 C4-4.7uF.1 C5-4.7uF.2 IC1.9 J1.01 J3.04 J?.2 MCP73831.2 PROG_HEADER.1 R4-10K.1 R5-10K.1
NetB1_3: "R 47k.2" B1.3 C3-10uF.1 C4-4.7uF.2 J?.1 MCP73831.3
NetC5-4.7uF_1: "R 470.1" "usb 2.0.1" C5-4.7uF.1 MCP73831.4
NetIC1_3: IC1.3 R2-10K.2
NetLED_1: LED.1 MCP73831.1
NetLED_2: "R 470.2" LED.2
NetMCP73831_5: "R 2k.2" MCP73831.5
RST: IC1.1 R1-10K.2
RX: IC1.15 PROG_HEADER.4
SCK: IC1.7 J3.02
SCL: IC1.14 J1.03
SDA: IC1.13 J1.04
Tare: IC1.10 J2.02 R4-10K.2
TX: IC1.16 PROG_HEADER.5
Unit: IC1.5 J2.04 R5-10K.2
VCC: B1.2 C1-10uF.1 C2-10uF.1 IC1.8 J1.02 J2.01 J2.03 J3.01 PROG_HEADER.6 R1-10K.1 R2-10K.1 R3-10K.2
pads on no net: "usb 2.0.2" "usb 2.0.3" "usb 2.0.4" "usb 2.0.6" "usb 2.0.7" "usb 2.0.8" "usb 2.0.9" "usb 2.0." B1.4 IC1.4 IC1.11 IC1.17 IC1.18 IC1.19 IC1.20 IC1.21 IC1.22 PROG_HEADER.3

## Silkscreen, mask and mechanical layers (free items; w line width, h text height)
Top Overlay:
  text "amp & load cell" at 122.555,74.126 h1.02
  text "voltage regulation" at 92.202,61.976 h1.52 r90
  text "Battery Charging Unit" at 12.954,36.745 h1.27
  text "main unit" at 142.875,17.272 h1.52
  text "programming port" at 133.35,4.445 h1.52
Bottom Overlay:
  lines w0.254: -3.175,-27.813 47.117,-27.813 47.117,-24.13 -3.175,-24.13 -3.175,-27.813 ; 33.274,110.236 49.276,110.236 49.276,118.491 33.274,118.491 33.274,110.236
  text "EN2160" at 48.768,114.808 h2.54
  text "ELECTRONIC DESIGN" at 48.768,112.712 h1.02
  text "REALIZATION" at 48.768,110.617 h1.02
  text "Designed By: Marasinghe M.M.H.N.B." at 46.355,-26.67 h1.52

## Text inside footprints (layer, text, board x,y; h text height)
"usb 2.0": Mechanical 13 "PCB Edge" at -0.381,11.684 h0.67 r270